# Altium PCB 123456.pcbdoc
Units mil, origin at the board's own origin, x right, y up, seen from the top; angles counter-clockwise.
Board outline 3835 x 3855 mil, 2 copper layers (Top Layer, Bottom Layer); 45 components, 53 nets, 208 pads, 38 vias.
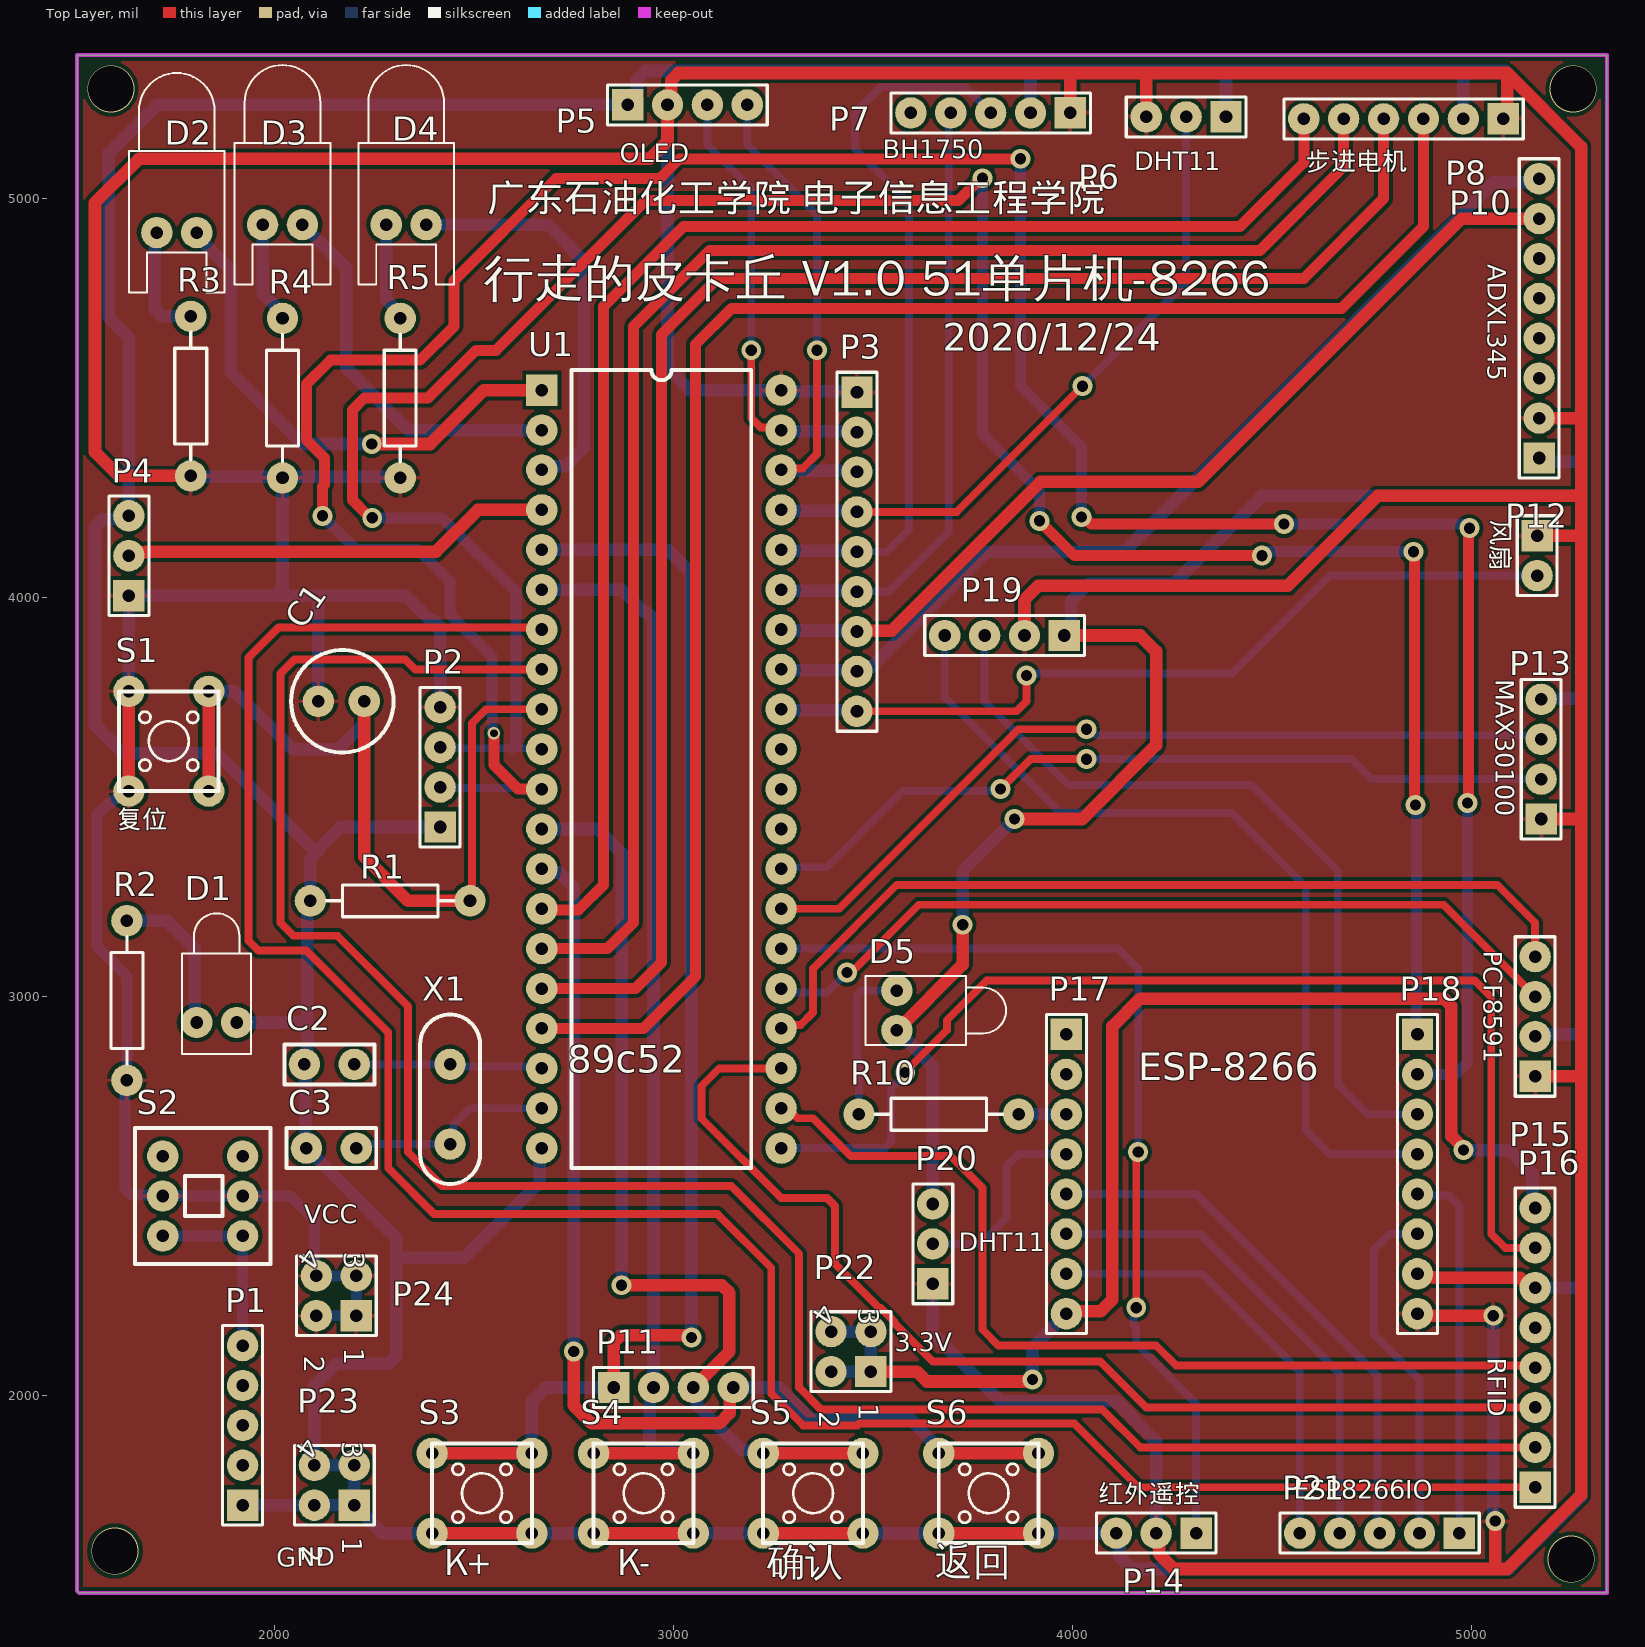
[diagram p0: Top Layer view]
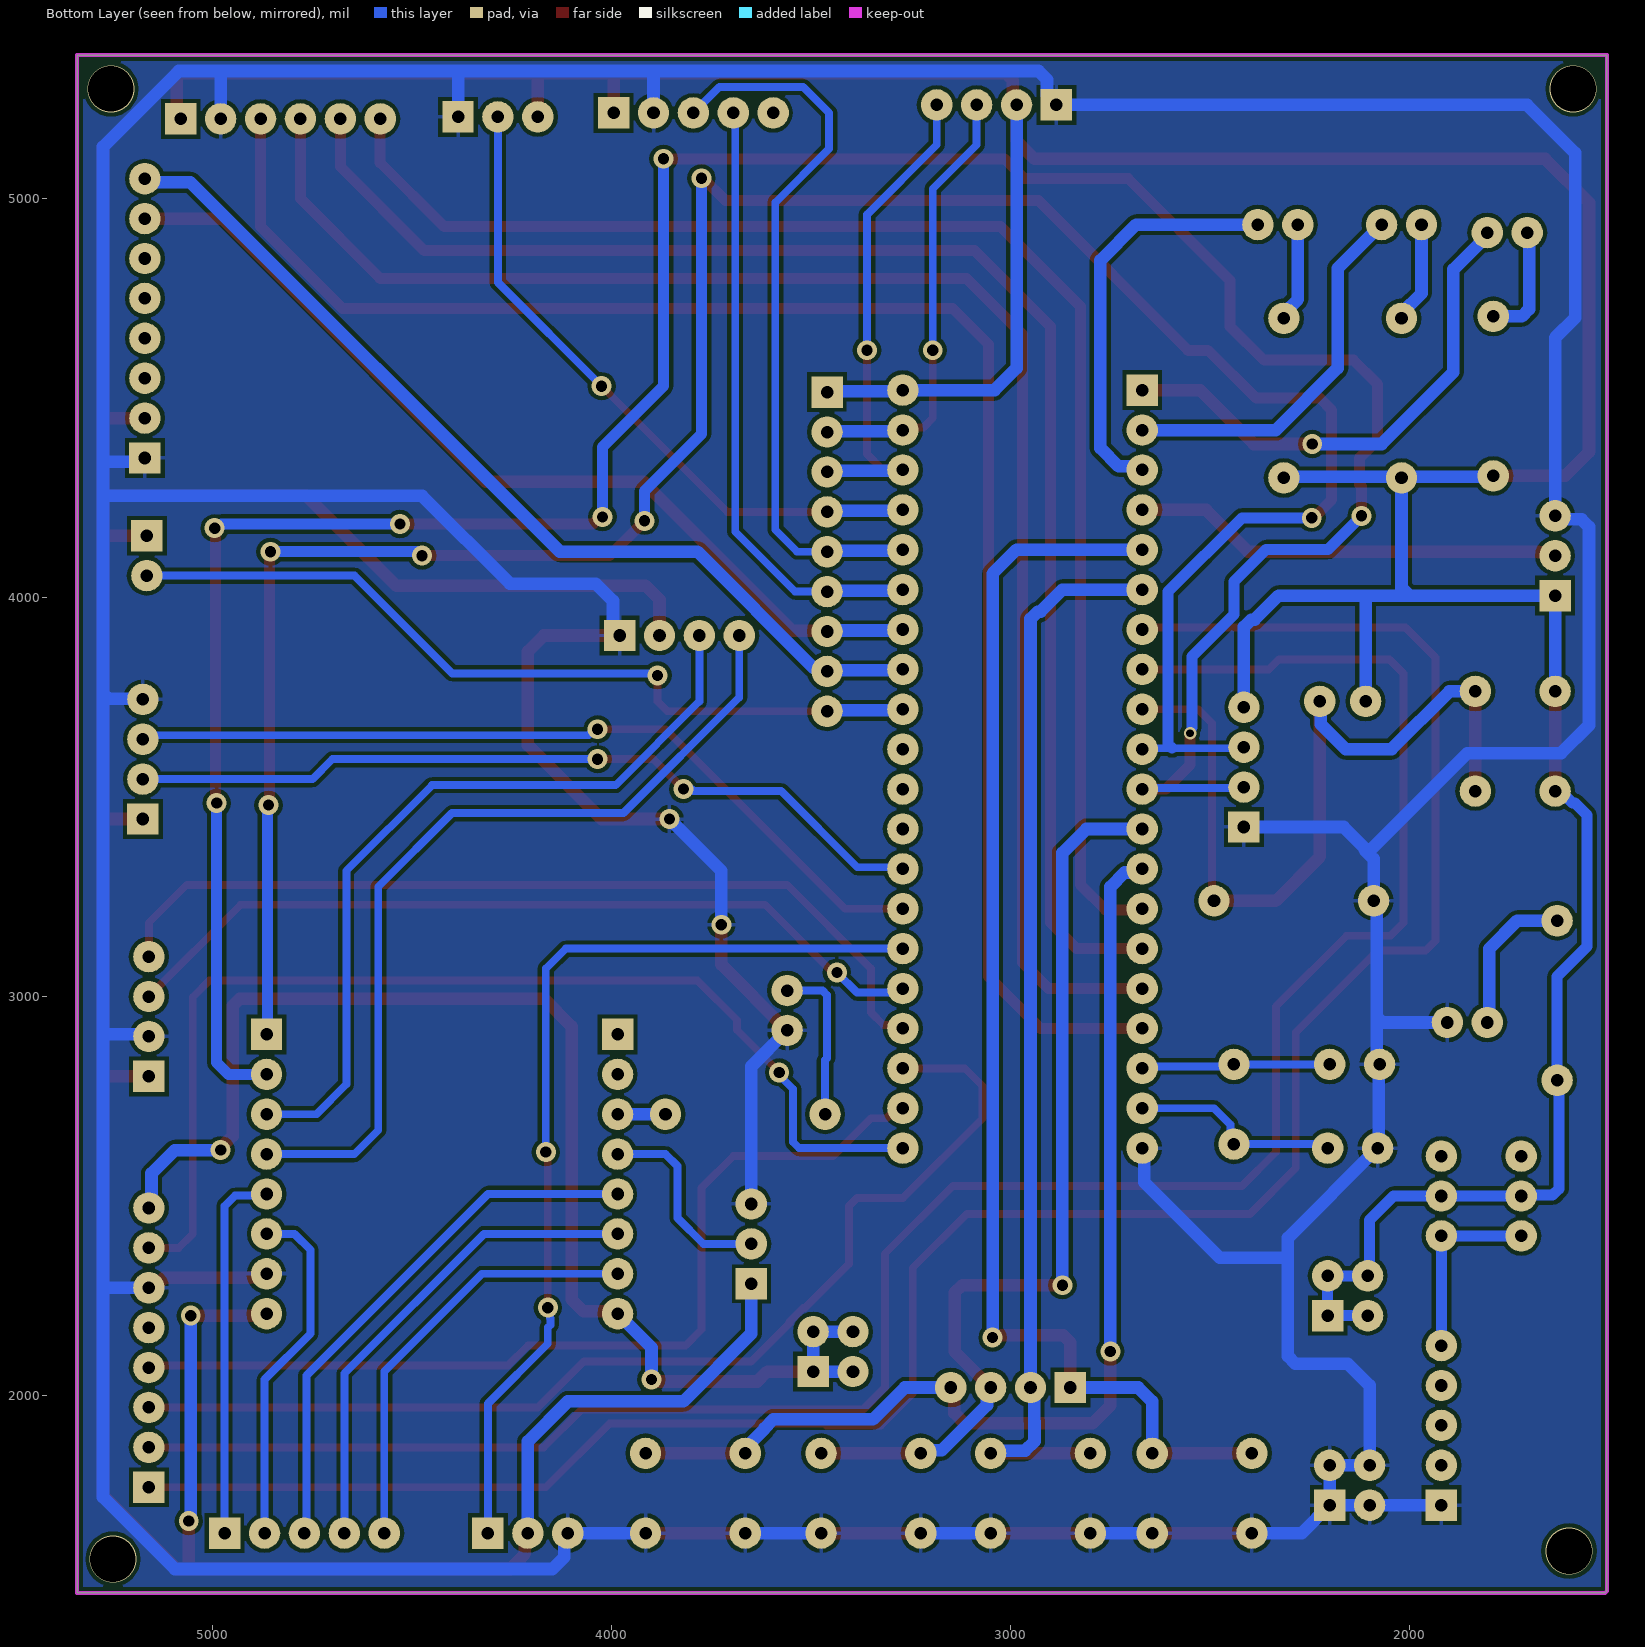
[diagram p1: Bottom Layer view, seen from below]

## Layer stack, top to bottom
Top Solder: solder mask 0.4, Solder Resist, Dk 3.5
Top Layer: signal copper 1.4
Dielectric1: dielectric 12.6, FR-4, Dk 4.8
Bottom Layer: signal copper 1.4
Bottom Solder: solder mask 0.4, Solder Resist, Dk 3.5

## Board outline
1510,1505 1505,1510 1505,5360 5340,5360 5340,1505

## Design rules (kind name [scope] priority, off if disabled: settings)
Clearance [All] p1: gap=10 ignorepadtopadclearanceinfootprint=FALSE except(0: Arc-Hole Track-Hole SMDPad-Hole THPad-Hole Via-Hole Fill-Hole Poly-Hole Region-Hole Text-Hole)
PolygonConnect [All] p1: connectstyle=Relief reliefconductorwidth=10 reliefentries=4 polygonreliefangle="90 Angle" airgapwidth=10
RoutingVias [All] p1: holewidth=28 width=50 viastyle="Through Hole" minholewidth=28 minwidth=50 maxholewidth=28 maxwidth=50
SolderMaskExpansion [All] p1: expansion=4 istentingtop=FALSE
Width [All] p1: maxlimit=10 minlimit=10 preferedwidth=10
30 further rules are at their usual default settings.

## Components (designator, comment, footprint, x,y, rotation, side; value= is the part's Value field where it differs from the comment)
C1 "10uf" ______ 2110,3740 r0 top
C2 "22pf" ? 2200,2830 r180 top
C3 "22pf" ? 2205,2620 r180 top
D1 "LED1" LED-1 1855,2935 r90 top
D2 "LED1" LED-0 1755,4915 r180 top
D3 "LED2" LED-0 2020,4935 r180 top
D4 "LED3" LED-0 2330,4935 r180 top
D5 "LED1" LED-1 3560,2965 r0 top
P1 "USB" HDR1X5 1920,1725 r90 top
P2 "USART" HDR1X4 2415,3425 r90 top
P3 "排阻" RESPACK9 3460,4115 r0 top
P4 "BEEP" HDR1X3 1635,4005 r90 top
P5 "OLED" HDR1X4 2885,5235 r0 top
P6 "DHT11" HDR1X3 4385,5205 r180 top
P7 "BH1750" HDR1X5 3995,5215 r180 top
P8 "步进电机" HDR1X6 5080,5200 r180 top
P10 "ADXL345" HDR1X8 5170,4350 r90 top
P11 "按键" HDR1X4 2850,2020 r0 top
P12 "风扇" HDR1X2 5165,4155 r270 top
P13 "MAX30100" HDR1X4 5175,3445 r90 top
P14 "红外遥控" HDR1X3 4310,1655 r180 top
P15 "PCF8591" HDR1X4 5160,2800 r90 top
P16 "RFID" HDR1X8 5160,1770 r90 top
P17 "wifi1" HDR1X8 3985,2905 r270 top
P18 "wifi2" HDR1X8 4865,2905 r270 top
P19 "WIFI_OLED" HDR1X4 3980,3905 r180 top
P20 "WIFI_DHT11" HDR1X3 3650,2280 r90 top
P21 "WIFI_IO" HDR1X5 4970,1655 r180 top
P22 "3.3V" HDR2X2 3495,2060 r90 top
P23 "GND" HDR2X2 2200,1725 r90 top
P24 "VCC" HDR2X2 2205,2200 r90 top
R1 "Res2" AXIAL-0.4 2290,3240 r180 top
R2 "Res2" AXIAL-0.4 1630,2990 r90 top
R3 "Res1" AXIAL-0.4 1790,4505 r270 top
R4 "Res2" AXIAL-0.4 2020,4500 r270 top
R5 "Res2" AXIAL-0.4 2315,4500 r270 top
R10 "Res2" AXIAL-0.4 3665,2705 r180 top
S1 "SW-PE2" KEYTOUCH 1635,3765 r0 top
S2 "自锁开关" ________ 1920,2400 r180 top
S3 "SW-PE2" KEYTOUCH 2645,1855 r270 top
S4 "SW-PE2" KEYTOUCH 2800,1655 r90 top
S5 "SW-PE2" KEYTOUCH 3475,1855 r270 top
S6 "SW-PE2" KEYTOUCH 3665,1655 r90 top
U1 "STC89C52" DIP40 2670,4520 r0 top
X1 "XTAL（晶振11.0592m）" XTAL 2440,2830 r270 top

## Footprints (in the part's own frame and the unit in brackets; to place one, negate y for a bottom-side part, rotate by r counter-clockwise, add the part's x,y. Pads: shape width x height; smd on the part's side, far side on the other; paste and mask are expansions set on the pad)
______ [mm]
  round 2 hole 0.8: 1(0,0) 2(2.921,0)
  silkscreen extent -1.74,-3.26 4.79,3.26
________ [mm]
  round 2 hole 0.8: 1(0,0) 2(0,-2.54) 3(0,-5.08) 4(5.08,-5.08) 5(5.08,-2.54) 6(5.08,0)
  silkscreen extent -1.78,-6.86 6.86,1.78
AXIAL-0.4 [mm]
  round 2 hole 0.8: 1(-5.08,0) 2(5.08,0)
  silkscreen extent -4.06,-1.02 4.06,1.02
DIP40 [mm]
  rect 2x2 hole 0.8: 1(0,0)
  round 2 hole 0.8: 2(0,-2.54) 3(0,-5.08) 4(0,-7.62) 5(0,-10.16) 6(0,-12.7) 7(0,-15.24) 8(0,-17.78) 9(0,-20.32) 10(0,-22.86) 11(0,-25.4) 12(0,-27.94) 13(0,-30.48) 14(0,-33.02) 15(0,-35.56) 16(0,-38.1) 17(0,-40.64) 18(0,-43.18) 19(0,-45.72) 20(0,-48.26) 21(15.24,-48.26) 22(15.24,-45.72) 23(15.24,-43.18) 24(15.24,-40.64) 25(15.24,-38.1) 26(15.24,-35.56) 27(15.24,-33.02) 28(15.24,-30.48) 29(15.24,-27.94) 30(15.24,-25.4) 31(15.24,-22.86) 32(15.24,-20.32) 33(15.24,-17.78) 34(15.24,-15.24) 35(15.24,-12.7) 36(15.24,-10.16) 37(15.24,-7.62) 38(15.24,-5.08) 39(15.24,-2.54) 40(15.24,0)
  silkscreen extent 1.91,-49.53 13.33,1.27
HDR1X2 [mm]
  rect 2x2 hole 0.8: 1(0,0)
  round 2 hole 0.8: 2(2.54,0)
  silkscreen extent -1.27,-1.27 3.81,1.27
HDR1X3 [mm]
  rect 2x2 hole 0.8: 1(0,0)
  round 2 hole 0.8: 2(2.54,0) 3(5.08,0)
  silkscreen extent -1.27,-1.27 6.35,1.27
HDR1X4 [mm]
  rect 2x2 hole 0.8: 1(0,0)
  round 2 hole 0.8: 2(2.54,0) 3(5.08,0) 4(7.62,0)
  silkscreen extent -1.27,-1.27 8.89,1.27
HDR1X5 [mm]
  rect 2x2 hole 0.8: 1(0,0)
  round 2 hole 0.8: 2(2.54,0) 3(5.08,0) 4(7.62,0) 5(10.16,0)
  silkscreen extent -1.27,-1.27 11.43,1.27
HDR1X6 [mm]
  rect 2x2 hole 0.8: 1(0,0)
  round 2 hole 0.8: 2(2.54,0) 3(5.08,0) 4(7.62,0) 5(10.16,0) 6(12.7,0)
  silkscreen extent -1.27,-1.27 13.97,1.27
HDR1X8 [mm]
  rect 2x2 hole 0.8: 1(0,0)
  round 2 hole 0.8: 2(2.54,0) 3(5.08,0) 4(7.62,0) 5(10.16,0) 6(12.7,0) 7(15.24,0) 8(17.78,0)
  silkscreen extent -1.27,-1.27 19.05,1.27
HDR2X2 [mm]
  rect 2x2 hole 0.8: 1(0,0)
  round 2 hole 0.8: 2(0,2.54) 3(2.54,0) 4(2.54,2.54)
  silkscreen extent -1.27,-1.27 3.81,3.81
KEYTOUCH [mm]
  round 2 hole 0.8: 1(0,-6.35) 1(0,0) 2(5.08,-6.35) 2(5.08,0)
  Top Layer lines w0.8: 0,-6.35 0,0 ; 5.08,-6.35 5.08,0 5.08,0.127
  silkscreen extent -0.64,-6.35 5.71,0
LED-0 [mm]
  round 2 hole 0.8: 1(1.27,0) 2(-1.27,0)
  silkscreen extent -3.05,-10.16 3.05,3.81
LED-1 [mm]
  round 2 hole 0.8: 1(0,1.27) 2(0,-1.27)
  silkscreen extent -2,-2.2 6.95,2.2
RESPACK9 [mm]
  rect 2x2 hole 0.8: 1(0,10.16)
  round 2 hole 0.8: 2(0,7.62) 3(0,5.08) 4(0,2.54) 5(0,0) 6(0,-2.54) 7(0,-5.08) 8(0,-7.62) 9(0,-10.16)
  silkscreen extent -1.27,-11.43 1.27,11.43
XTAL [mm]
  round 2 hole 0.8: 1(5.08,0) 2(0,0)
  silkscreen extent -3.18,-1.91 7.62,1.91
? [mm]
  round 2 hole 0.8: 1(0,0) 2(3.175,0)
  silkscreen extent -1.27,-1.27 4.44,1.27

## Via types
v1: diameter 50, hole 28, Top Layer to Bottom Layer, 33 vias
v2: diameter 118.11, hole 113.98, Top Layer to Bottom Layer, 4 vias
v3: diameter 31.5, hole 19.68, Top Layer to Bottom Layer, 1 vias

## Nets (pads, with @x,y where several pads share a name; then routed paths per layer and width w, separated by ;. In a path a pad name is that pad's centre, name@x,y a point inside that pad or via, vN(x,y) a via of type N, cw(c..) or ccw(c..) an arc to the next point about the centre after c; other vN are vias at no path point)
3.3V: P16.8 P17.8 P22.1 P22.2 P22.3 P22.4 | length 3252.7
  Top Layer w31.5: P22.1 3610,2060 3635,2035 v1@3881.92,2035 ; v1@3896.2,2036.46 3899.74,2040 v1(3900,2040) ; P17.8 3991.61,2211.61 4071.61,2211.61 4100,2240 4100,2925 4170,2995 4931.55,2995 4950,2976.55 4950,2650 v1@4975,2625
  Bottom Layer w31.5: P22.2 P22.1 P22.3 P22.4 ; v1(3900,2040) 3900,2120 P17.8 ; v1(4980,2615) 5095,2615 5153.39,2556.61 5153.39,2476.61 P16.8
ADXL_SDA: P3.7 P10.7 U1.34 | length 2330.8
  Top Layer w31.5: P3.7 3461.61,3916.61 3546.61,3916.61 3920,4290 4315,4290 4975,4950 P10.7
  Bottom Layer w31.5: U1.34 3272.5,3917.5 3457.5,3917.5 P3.7
AXDL_SCL: P3.8 P10.8 U1.33 | length 2413.6
  Bottom Layer w31.5: U1.33 3272.5,3817.5 3457.5,3817.5 P3.8 3469.04,3824.04 3494.04,3824.04 3785,4115 4130,4115 5055.96,5040.96 5160.96,5040.96 P10.8
BEEP: P4.2 U1.4 | length 1082.6
  Top Layer w31.5: P4.2 1644.04,4114.04 1676.11,4114.04 1677.07,4115 2405,4115 2510,4220 U1.4
BH1750_SCL: P3.5 P7.3 U1.36 | length 1839.6
  Bottom Layer w19.68: P3.5 3535,4115 3590,4170 3590,4990 3455,5125 3455,5215 3520,5280 3730,5280 P7.3
  Bottom Layer w31.5: U1.36 3272.5,4117.5 3457.5,4117.5 P3.5
BH1750_SDA: P3.6 P7.4 U1.35 | length 1536.3
  Bottom Layer w19.68: P3.6 3540,4015 3690,4165 3690,5210 P7.4
  Bottom Layer w31.5: U1.35 3272.5,4017.5 3457.5,4017.5 P3.6
D3: P18.5 P21.1 | length 937.4
  Bottom Layer w19.68: P18.5 4869.03,2500.97 4944.03,2500.97 4970,2475 P21.1
D4: P18.6 P21.2 | length 884.2
  Bottom Layer w19.68: P18.6 4795,2405 4755,2365 4755,2155 4870,2040 P21.2
D6: P17.5 P21.3 | length 1365.5
  Bottom Layer w19.68: P17.5 4310,2505 4765,2050 4765,1660 P21.3
D7: P17.6 P21.4 | length 1230
  Bottom Layer w19.68: P17.6 4320,2405 4670,2055 P21.4
D8: P17.7 P21.5 | length 1091.5
  Bottom Layer w19.68: P17.7 4325,2305 4570,2060 P21.5
DHT11_DATA: P3.4 P6.2 U1.37 | length 1670.2
  Top Layer w19.68: P3.4 3710,4215 v1(4025,4530)
  Bottom Layer w19.68: v1(4025,4530) 4285,4790 P6.2
  Bottom Layer w31.5: U1.37 3272.5,4217.5 3457.5,4217.5 P3.4
FEE: P3.9 P12.2 U1.32 | length 2063.9
  Top Layer w19.68: P3.9 3860,3715 3885,3740 v1(3885,3805)
  Bottom Layer w19.68: v1@3895,3810 4399.51,3810 4644.51,4055 P12.2
  Bottom Layer w31.5: U1.32 3272.5,3717.5 3457.5,3717.5 P3.9
GND: C2.2 C3.2 D1.2 D5.2 P1.1 P2.1 P4.3 P5.1 P6.1 P7.2 P8.2 P10.1 P13.4 P14.3 P15.2 P16.6 P18.7 P19.1 P20.3 P23.1 P23.2 P23.3 P23.4 R1.2 S3.2 S4.1 S5.2 S6.1 U1.20 | length 19684
  Top Layer w31.5: D5.2 3725,3080 v1(3725,3180) ; v1(3855,3445) 4025,3445 4210,3630 4210,3865 4170,3905 P19.1 ; P18.7 4874.04,2295.96 4906.11,2295.96 4907.07,2295 5122.22,2295 5147.22,2270 P16.6
  Bottom Layer w19.68: R1.2@2082.5,3216.52 2090.49,3224.51 R1.2@2100,3234.02
  Bottom Layer w31.5: D1.2 2067.5,2935 2082.5,2950 ; P1.1 P23.2 P23.1 ; 2107.5,3367.5 2165,3425 P2.1 ; S3.2@2395,1655 2270,1655 P23.1 ; S3.2@2645,1655 S4.1@2800,1655 ; U1.20 2665,2615 2665,2535 2475,2345 2305,2345 ; S4.1@3050,1655 S5.2@3225,1655 ; S5.2@3475,1655 S6.1@3665,1655 ; D5.2 3650,2825 P20.3 ; v1(3725,3180) 3725,3315 v1@3840,3430 ; P7.2 3895,5320 ; S6.1@3915,1655 P14.3 4119.04,1645.96 4119.04,1594.41 4148.45,1565 5095,1565 5275,1745 5275,2280 ; P19.1 3996.61,3921.61 3996.61,3991.61 4040,4035 4255,4035 4475,4255 5275,4255 ; P6.1 4385,5320 ; P8.2 4980,5320 ; P16.6 5265,2270 5275,2280 ; P15.2 5165,2905 5275,2905 ; P10.1 5180,4340 5275,4340 ; P13.4 5176.61,3746.61 5261.61,3746.61 5275,3760 ; 2082.5,2950 2082.5,2935 2082.5,2837.5 C2.2 2077.5,2827.5 2077.5,2622.5 C3.2 2305,2395 2305,2345 ; 2082.5,2950 2082.5,3216.52 2082.5,3232.5 R1.2 2090,3345 2112.5,3367.5 2097.5,3367.5 1855,3610 1620,3610 1550,3680 1550,4177.51 1568.45,4195.96 1625.96,4195.96 P4.3 1635,4651.39 1585,4701.39 1585,5115 1705,5235 P5.1 2908.62,5258.62 2908.62,5298.62 2930,5320 3895,5320 ; P23.1 P23.3 P23.4 2100,2025 2155,2080 2286.55,2080 2305,2098.45 2305,2345 ; 3895,5320 4385,5320 ; 4385,5320 4980,5320 ; 4980,5320 5085,5320 5275,5130 5275,4340 ; 5275,2280 5275,2905 ; 5275,2905 5275,3746.61 5275,3760 ; 5275,3760 5275,4255 ; 5275,4255 5275,4340
HRST: C1.2 R1.1 S1.2 U1.9 | length 1869.1
  Top Layer w19.68: R1.1 2495,3245 2495,3685 2530,3720 U1.9
  Top Layer w31.5: C1.2 2225,3350 2335,3240 R1.1
  Bottom Layer w31.5: S1.2@1835,3765 1900,3765 2045,3620 2160,3620 2222.75,3682.75 2222.75,3737.75 C1.2
IN1: P8.6 U1.14 | length 3646.9
  Top Layer w27.56: U1.14 2673.59,3216.41 2761.41,3216.41 2825,3280 2825,4730 3025,4930 4420,4930 4580,5090 P8.6
IN2: P8.5 U1.15 | length 3817.6
  Top Layer w27.56: U1.15 2835,3120 2900,3185 2900,4680 3090,4870 4470,4870 4680,5080 P8.5
IN3: P8.4 U1.16 | length 4052.8
  Top Layer w27.56: U1.16 2905,3020 2970,3085 2970,4660 3110,4800 4580,4800 4780,5000 P8.4
IN4: P8.3 U1.17 | length 4241
  Top Layer w27.56: U1.17 2925,2920 3055,3050 3055,4635 3145,4725 4675,4725 4880,4930 P8.3
IRRE: P14.1 U1.26 | length 2400.7
  Top Layer w19.68: v1(4160,2220) 4160,2605 v1(4165,2610)
  Bottom Layer w19.68: U1.26 4115,3120 4165,3070 v1(4165,2610) ; v1(4160,2220) 4154.2,2214.2 4154.2,2194.51 4153,2193.31 4153,2177 4160,2170 4160,2130 4310,1980 P14.1
KEY1: P11.1 S3.1 U1.5 | length 2982.7
  Top Layer w31.5: P11.1 2850,2133.01 2868.45,2151.46 3025.46,2151.46 3028.38,2148.54 3041.46,2148.54 v1(3045,2145)
  Bottom Layer w31.5: S3.1@2645,1855 2645,1985 2680,2020 P11.1 ; U1.5 2985,4120 3045,4060 v1(3045,2145)
KEY2: P11.2 S4.2 U1.6 | length 2498.5
  Bottom Layer w31.5: U1.6 2870,4020 2925,3965 2931.55,3965 2950,3946.55 P11.2 2940.96,2010.96 2940.96,1935.18 2940,1934.22 2940,1885 2963.39,1861.61 3043.39,1861.61 S4.2@3050,1855
KEY3: P11.3 S5.1 U1.12 | length 2125.2
  Top Layer w31.5: v1(2870,2276.25) 3121.55,2276.25 3140,2257.8 3140,2110 P11.3
  Bottom Layer w31.5: U1.12 2810,3420 2870,3360 v1(2870,2276.25) ; P11.3 3059.04,2010.96 3059.04,1975.96 3172.75,1862.25 3217.75,1862.25 S5.1@3225,1855
KEY4: P11.4 S6.2 U1.13 | length 2478.9
  Top Layer w31.5: v1(2750,2110.49) 2750,1975 2795,1930 3115,1930 3140.96,1955.96 3140.96,2010.96 P11.4
  Bottom Layer w31.5: U1.13 2679.04,3310.96 2714.04,3310.96 2750,3275 v1(2750,2110.49) ; P11.4 3265,2020 3345,1940 3595,1940 3617.27,1917.73 3617.27,1915.51 3665,1867.78 S6.2@3665,1855
LED1: D2.2 U1.1 | length 1295.7
  Top Layer w31.5: v1(2243.78,4385) 2390,4385 2525,4520 U1.1
  Bottom Layer w31.5: D2.2 1805,4907.78 1890,4822.78 1890,4565 2070,4385 v1(2243.78,4385)
LED2: D3.2 U1.2 | length 959.8
  Bottom Layer w31.5: D3.2 2180,4825 2180,4575 2335,4420 U1.2
LED3: D4.2 U1.3 | length 1030.1
  Bottom Layer w31.5: D4.2 2685,4935 2775,4845 2775,4375 2729.04,4329.04 2679.04,4329.04 U1.3
M_MFMISO: P16.4 U1.22 | length 2367.2
  Top Layer w19.68: U1.22 3285.98,2720 3310.98,2695 3350,2695 3445,2600 3695,2600 3775,2520 3775,2165 3815,2125 4210,2125 4260,2075 5155,2075 P16.4
M_MFMOSI: P16.3 U1.23 | length 2776.1
  Top Layer w19.68: U1.23 3115,2820 3070,2775 3070,2695 3270,2495 3385,2495 3405,2475 3405,2330 3515.79,2219.21 3519.53,2219.21 3554.21,2184.53 3554.21,2180.79 3650,2085 4070,2085 4185,1970 P16.3
M_MFRST: P16.7 U1.21 | length 2785.8
  Top Layer w19.68: v1(3580,2810) 3685.4,2915.4 3685.4,2940.4 3785,3040 5008.47,3040 5050,2998.47 5050,2405 5085,2370 P16.7
  Bottom Layer w19.68: U1.21 3530,2620 3545,2635 3545,2767.89 3580,2802.89 v1(3580,2810)
M_MFSCK: P16.2 U1.8 | length 5404.6
  Top Layer w19.68: U1.8 2352.78,3820 2327.78,3845 2050,3845 2015,3810 2015,3185 2047.5,3152.5 2157.5,3152.5 2335,2975 2335,2610 2420,2525 3145,2525 3315,2355 3315,2020 3370,1965 4075,1965 4170,1870 P16.2
M_MFSDA: P16.1 U1.7 | length 5658.4
  Top Layer w19.68: U1.7 2665,3925 2010,3925 1935,3850 1935,3140 1960,3115 2080,3115 2285,2910 2285,2570 2400,2455 3110,2455 3245,2320 3245,2005 3325,1925 3461.26,1925 3466.26,1930 4005,1930 4165,1770 P16.1
MAX_SCL: P13.3 U1.27 | length 2101.8
  Top Layer w19.68: U1.27 3415,3220 3865,3670 v1(4035,3670)
  Bottom Layer w19.68: v1(4035,3670) 4043.2,3670 4058.36,3654.84 5165.16,3654.84 P13.3
MAX_SDA: P13.2 U1.28 | length 2019.6
  Top Layer w19.68: v1(3820,3520) 3895,3595 v1(4035,3595)
  Bottom Layer w19.68: U1.28 3274.03,3324.03 3384.03,3324.03 3575,3515 3795,3515 v1@3800,3520 ; v1(4035,3595) 4700,3595 4750,3545 P13.2
NETD1_1: D1.1 R2.2 | length 386.1
  Bottom Layer w31.5: R2.2 1730,3190 1800,3120 1800,2940 D1.1
NETD2_1: D2.1 R3.1 | length 299.7
  Bottom Layer w31.5: D2.1@1700,4925.48 1700,4723.45 1718.45,4705 R3.1
NETD3_1: D3.1 R4.1 | length 255.7
  Bottom Layer w31.5: D3.1 1970,4762.78 2020,4712.78 R4.1
NETD4_1: D4.1 R5.1 | length 249.5
  Bottom Layer w31.5: D4.1 2280,4747.78 2315,4712.78 R5.1
NETD5_1: D5.1 R10.2 | length 405.3
  Bottom Layer w19.68: R10.2 3465,2840.49 3460,2845.49 3460,3003.47 3471.53,3015 D5.1
OLED_SCL: P3.2 P5.3 U1.39 | length 1110.1
  Top Layer w19.68: v1(3195,4620) 3195,4450 3218.47,4426.53 3263.47,4426.53 U1.39
  Bottom Layer w19.68: P5.3 3085,5135 3195,5025 3195,4861.6 v1(3195,4620)
  Bottom Layer w31.5: U1.39 3272.5,4417.5 3457.5,4417.5 P3.2
OLED_SDA: P3.3 P5.4 U1.38 | length 1246.1
  Top Layer w19.68: U1.38 3274.03,4324.03 3324.03,4324.03 3360,4360 v1(3360,4620)
  Bottom Layer w19.68: P5.4 3185,5135 3360,4960 v1(3360,4620)
  Bottom Layer w31.5: U1.38 3272.5,4317.5 3457.5,4317.5 P3.3
PCF_SCL: P15.4 U1.24 | length 2227.9
  Top Layer w19.68: U1.24 3279.03,2929.03 3319.03,2929.03 3350,2960 3350,3070 3560,3280 5065,3280 5160,3185 P15.4
PCF_SDA: P15.3 U1.25 | length 2080.5
  Top Layer w19.68: v1(3435,3060) 3445,3060 3615,3230 4930,3230 P15.3
  Bottom Layer w19.68: U1.25 3280,3010 3385,3010 v1(3435,3060)
RXD: P2.3 P18.1 U1.10 | length 6302.4
  Top Layer w27.56: v1@2235,4205 2195,4245 2195,4470 2225,4500 2385,4500 2505,4620 2555,4620 2930,4995 3074.67,4995 3715,4995 3771.22,5051.22 v1(3775,5051.22) ; v1(3917.5,4192.5) 4005,4105 v1(4475,4105) ; v1(4855,4115) 4857.5,4112.5 4857.5,3482.5 v1(4860,3480)
  Bottom Layer w19.68: P2.3 2417.5,3622.5 2555,3622.5 2595,3622.5 2605,3622.5 2667.5,3622.5 U1.10
  Bottom Layer w27.56: v1(2245,4200) 2420,4200 2605,4015 2605,3632.5 2595,3622.5 ; v1(3775,5051.22) 3775,4410 3917.5,4267.5 v1(3917.5,4192.5) ; v1(4475,4105) 4485,4115 v1(4855,4115) ; v1(4860,3480) 4862.5,3477.5 4862.5,2907.5 P18.1
TXD: P2.2 P18.2 U1.11 | length 7144.3
  Top Layer w27.56: v1(2120,4205) 2120,4278.04 2125,4283.04 2125,4350 2080,4395 2080,4535 2140,4595 2365,4595 2450,4680 2450,4795 2705,5050 2965,5050 3015,5100 v1(3870,5100) ; v3(2550,3660) 2550,3580 2610,3520 U1.11 ; v1(4022.77,4202.23) 4028.84,4202.23 4046.61,4184.46 v1(4530.54,4184.46) ; v1(4990,3485) 4992.5,3487.5 4992.5,4171.43 v1(4995,4173.93)
  Bottom Layer w19.68: P2.2 2417.5,3522.5 2667.5,3522.5 U1.11
  Bottom Layer w27.56: v1(2120,4205) 2204.65,4120.35 2359.65,4120.35 2440,4040 2440,3957.45 2545,3852.45 2545,3675 ; v1(3870,5100) 3870,4530 4022.77,4377.23 v1(4022.77,4202.23) ; v1(4530.54,4184.46) 4978.39,4184.46 4988.93,4173.93 v1(4995,4173.93) ; P18.2 4960,2805 4990,2835 v1(4990,3485)
VCC: C1.1 P2.4 P3.1 P4.1 P5.2 P6.3 P7.1 P8.1 P10.2 P12.1 P13.1 P14.2 P15.1 P18.8 P19.2 P20.1 P24.1 P24.2 P24.3 P24.4 R2.1 R3.2 R4.2 R5.2 S1.1 S2.2 S2.5 U1.40 | length 19259.8
  Top Layer w31.5: R3.2 1610,4305 1550,4365 1550,4990 1660,5100 2940,5100 2985,5145 P5.2 2994.04,5244.04 2994.04,5296.55 3012.49,5315 3995,5315 ; P19.2 3880,3995 3915,4030 4540,4030 4765,4255 5275,4255 ; P7.1 3995,5315 ; P6.3 4185,5315 ; P14.2 4217.25,1647.75 4217.25,1602.75 4255,1565 5050,1565 ; P18.8 4870,2200 v1(5055,2200) ; v1(5060,1685) 5060,1575 5050,1565 ; P8.1 5090,5210 5090,5315 ; P15.1 5270,2800 5275,2805 ; P12.1 5270,4155 5275,4150 ; P10.2 5265,4450 5275,4460 ; P13.1 5270,3445 5275,3440 ; 3995,5315 4185,5315 ; 4185,5315 5090,5315 ; 5050,1565 5090,1565 5275,1750 5275,1888.74 5275,2139.74 5275,2805 ; 5090,5315 5275,5130 5275,4460 ; 5275,2805 5275,3440 ; 5275,3440 5275,4150 ; 5275,4150 5275,4255 ; 5275,4255 5275,4460
  Bottom Layer w27.56: R2.1 1630,3050 1555,3125 1555,3455 1585,3485 1591.15,3485 1621.15,3515 S1.1@1635,3515 ; R2.1@1650,2790 1648.64,2790 1625,2766.36 1625,2518.15 1641.14,2502.01 1717.99,2502.01 S2.5 S2.2 2040,2500 2100,2440 2100,2305 P24.4 P24.3 P24.1 P24.2
  Bottom Layer w31.5: S1.1@1635,3765 P4.1 2000,4005 ; R3.2 1792.5,4302.5 2312.5,4302.5 R5.2 ; R4.2 2020,4025 2000,4005 ; C1.1 2110,4005 ; P2.4 2415,3926.55 2396.55,3945 2388.28,3945 2328.28,4005 2110,4005 ; P5.2 2985,4575 3040,4520 U1.40 3272.5,4517.5 3457.5,4517.5 P3.1 ; P20.1 3650,2155 3820,1985 4110,1985 4210,1885 P14.2 ; v1(5055,2200) 5055,1690 v1(5060,1685) ; 2000,4005 2110,4005
VCC_5V: P1.5 S2.1 S2.6 | length 475
  Bottom Layer w27.56: S2.6 S2.1 P1.5
WIFI_DATA: P17.4 P20.2 | length 504.4
  Bottom Layer w19.68: P20.2 3770,2380 3835,2445 3835,2575 3865,2605 P17.4
WIFI_LED: P17.3 R10.1 | length 120
  Bottom Layer w31.5: R10.1 P17.3
WIFI_SCL: P18.3 P19.3 | length 1992.1
  Bottom Layer w19.68: P19.3 3780,3740 3990,3530 4450,3530 4665,3315 4665,2780 4740,2705 P18.3
WIFI_SDA: P18.4 P19.4 | length 2171.6
  Bottom Layer w19.68: P19.4 3680,3750 3970,3460 4400,3460 4585,3275 4585,2665 4645,2605 P18.4
XTAL1: C3.1 U1.19 X1.1 | length 529.9
  Bottom Layer w19.68: C3.1 2215,2630 X1.1 2449.03,2639.03 2449.03,2679.03 2490,2720 U1.19
XTAL2: C2.1 U1.18 X1.2 | length 474.1
  Bottom Layer w19.68: C2.1 X1.2 2445,2825 2665,2825 U1.18
pads on no net: P1.2 P1.3 P1.4 P7.5 P10.3 P10.4 P10.5 P10.6 P16.5 P17.1 P17.2 S2.3 S2.4 U1.29 U1.30 U1.31
copper on no net:
  other v2: 5250,1590 1600,1610 1590,5275 5255,5275

## Polygon pours and split planes (outlines as drawn)
GND on Bottom Layer "Bottom Layer-GND" (solid, pour order 0): 1505,1510 1505,5360 5340,5360 5340,1505 1510,1505
no net on Top Layer "NONET_L01_P003" (solid, pour order 3): 1510,1505 1505,1510 1505,5360 5340,5360 5340,1505
VCC on Top Layer "VCC_L01_P002" (solid, pour order 2): 1510,1505 1505,1510 1505,5360 5340,5360 5340,1505

## Silkscreen, mask and mechanical layers (free items; w line width, h text height)
Top Overlay:
  text "BH1750" at 3525,5085 h80
  text "OLED" at 2865,5075 h80
  text "DHT11" at 4155,5055 h80
  text "步进电机" at 4585,5055 h80
  text "广东石油化工学院 电子信息工程学院" at 2535,4945 h119.37
  text "ADXL345" at 5025,4835 h80 r270
  text "行走的皮卡丘 V1.0 51单片机-8266" at 2525,4725 h158.74
  text "2020/12/24" at 3675,4595 h119.37
  text "风扇" at 5035,4195 h80 r270
  text "MAX30100" at 5045,3795 h80 r270
  text "复位" at 1605,3405 h80
  text "PCF8591" at 5015,3115 h80 r270
  text "89c52" at 2735,2785 h119.37
  text "ESP-8266" at 4165,2766.63 h119.37
  text "VCC" at 2075,2415 h80
  text "DHT11" at 3715,2345 h80
  text "3.3V" at 3555,2095 h80
  text "RFID" at 5025,2095 h80 r270
  text "ESP8266IO" at 4555,1725 h80
  text "红外遥控" at 4065,1715 h80
  text "GND" at 2005,1555 h80 r1
  text "K+           K-          确认        返回" at 2425,1525 h119.37
Document:
  lines w0.1: 3421.5,3431.5 3423.5,3433.5

## Text inside footprints (layer, text, board x,y; h text height)
P22: Top Overlay "1" at 3465,1980 h50 r270; Top Overlay "2" at 3365,1960 h50 r270; Top Overlay "4" at 3369.52,2234.34 h50 r235; Top Overlay "3" at 3465,2220 h50 r270
P23: Top Overlay "1" at 2170,1645 h50 r270; Top Overlay "2" at 2070,1625 h50 r270; Top Overlay "4" at 2074.52,1899.34 h50 r235; Top Overlay "3" at 2170,1885 h50 r270
P24: Top Overlay "1" at 2175,2120 h50 r270; Top Overlay "2" at 2075,2100 h50 r270; Top Overlay "4" at 2079.52,2374.34 h50 r235; Top Overlay "3" at 2175,2360 h50 r270